# Altium PCB PC110.PcbDoc (part 12 of 24)
Units mm, origin at the board's own origin, x right, y up, seen from the top; angles counter-clockwise.
Board outline 150.05 x 107.35 mm, 10 copper layers (In2.Cu, F.Cu, B.Cu, In1.Cu, In3.Cu, In4.Cu, In5.Cu, In6.Cu, In7.Cu, In8.Cu); 936 components, 1434 nets, 4891 pads, 6088 vias.
Unrouted connection lines stored in the file: 2995.
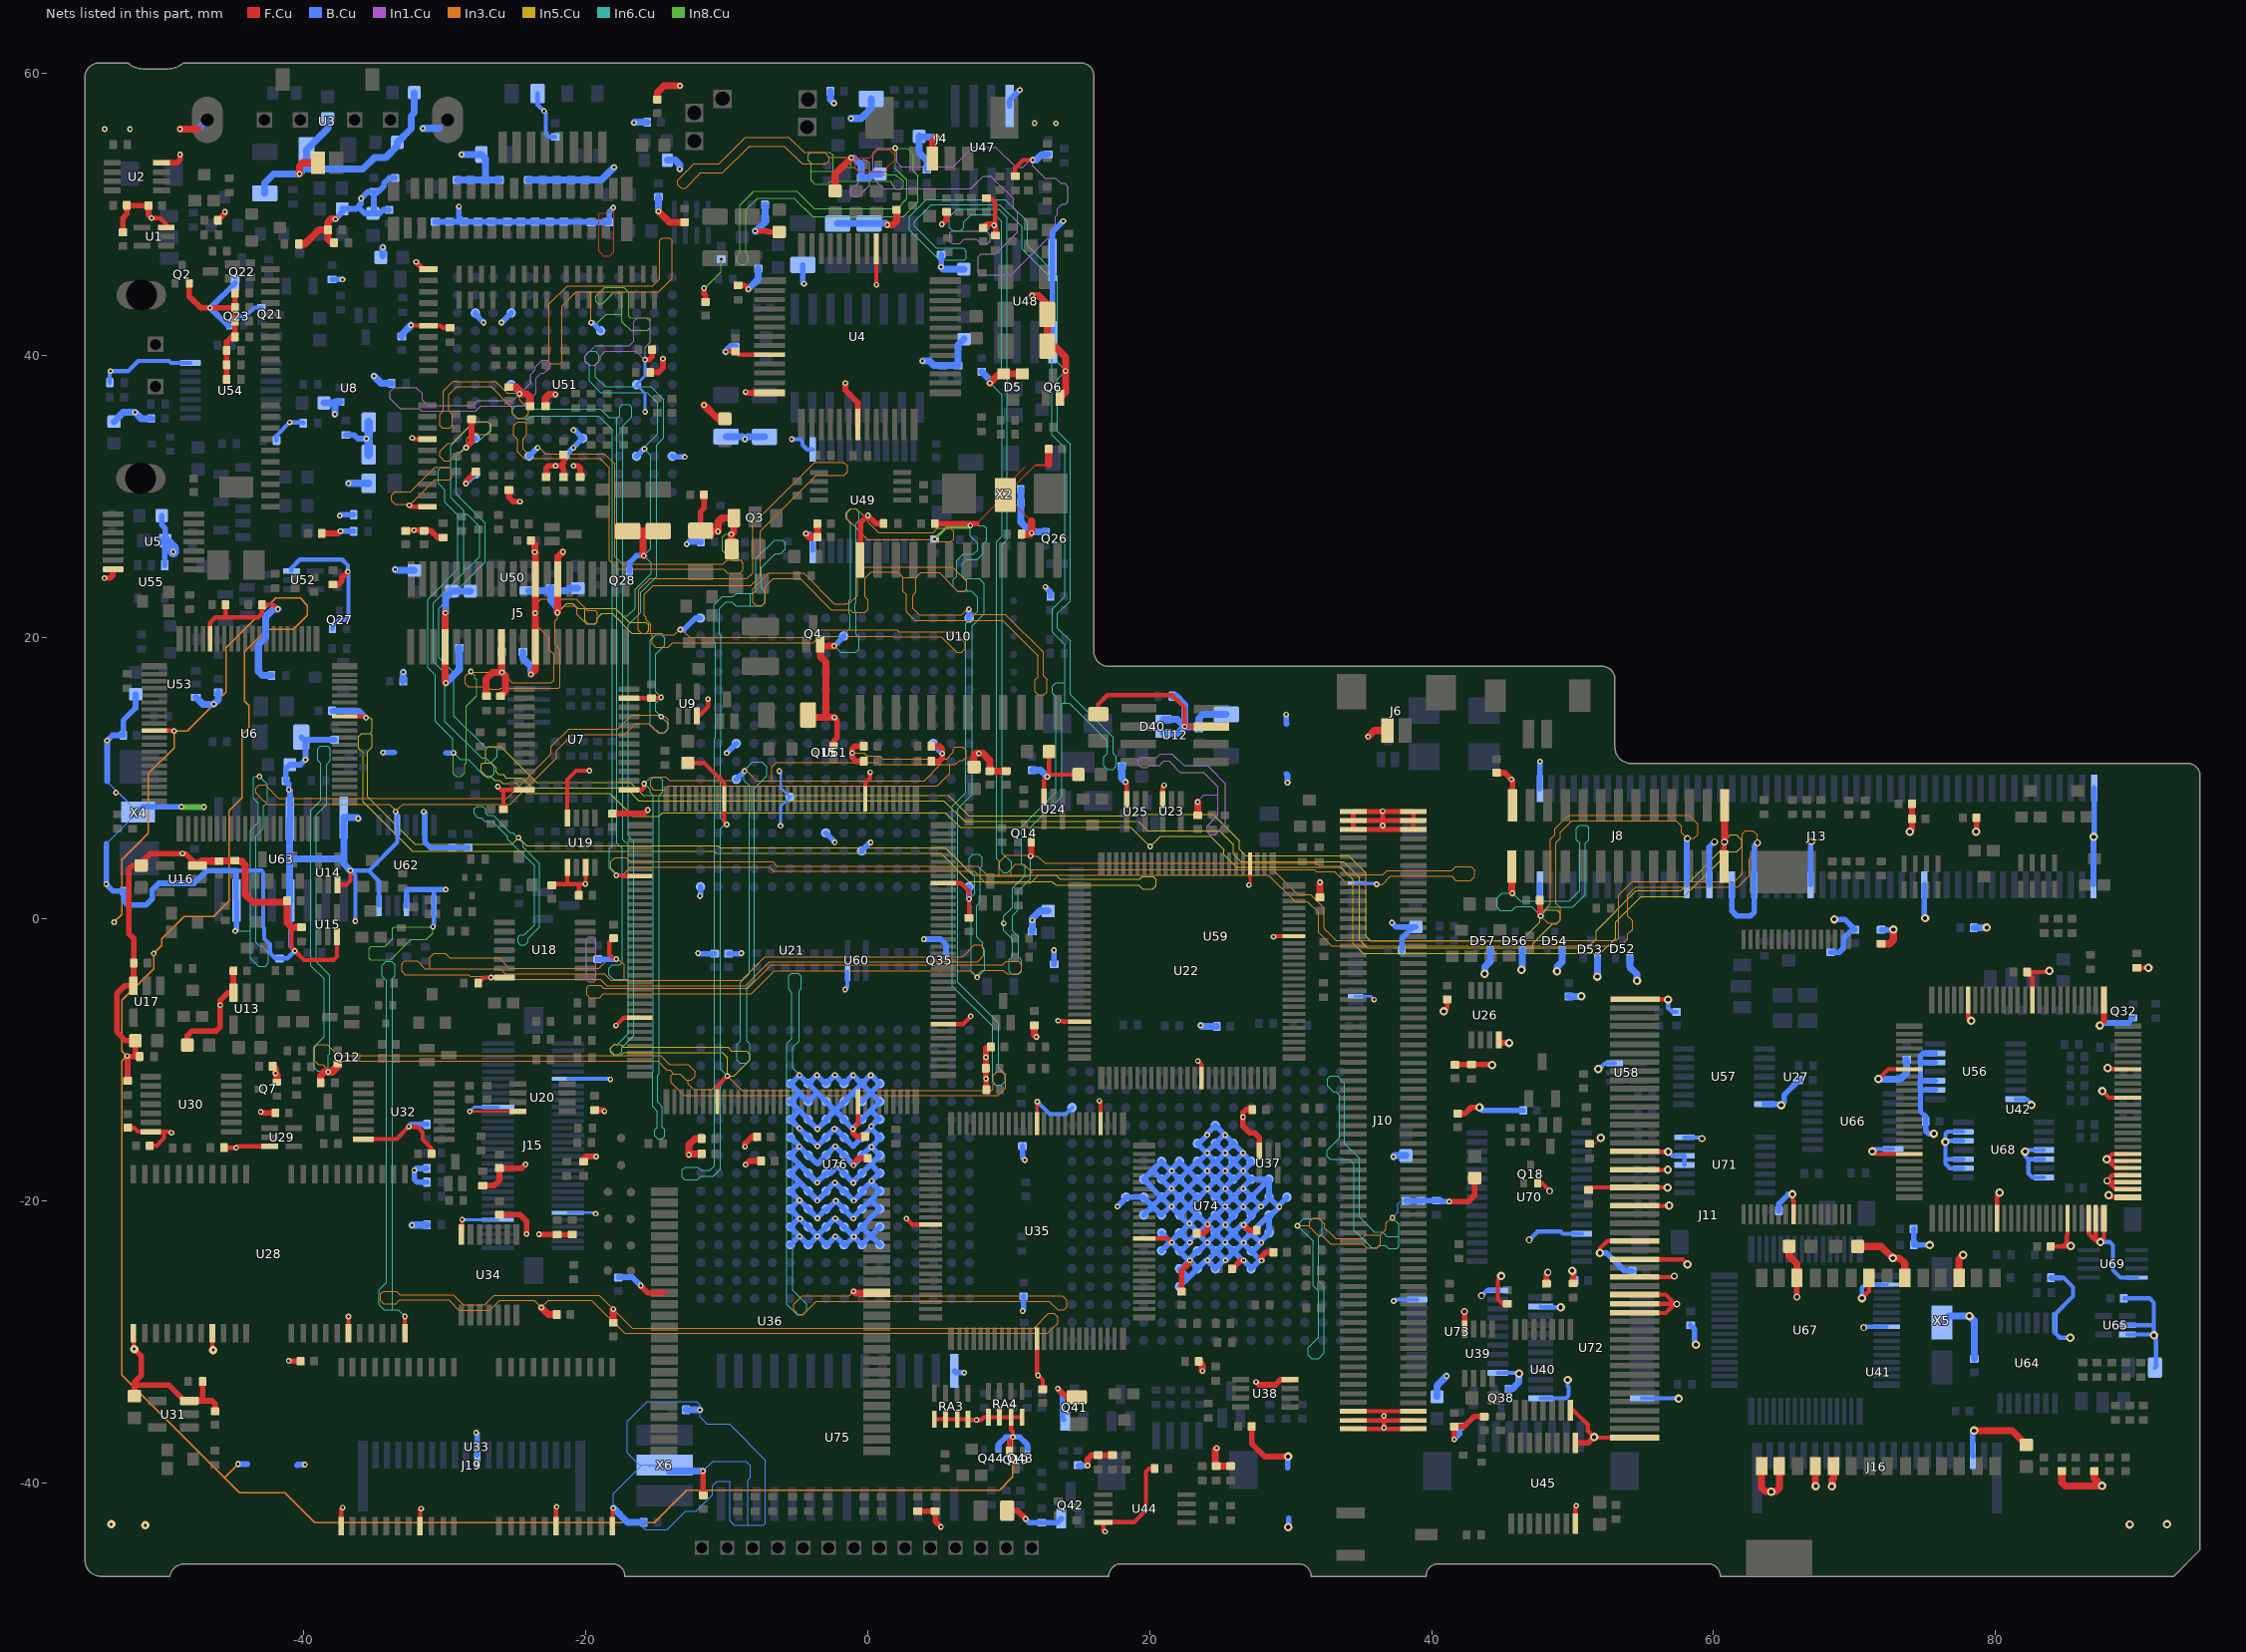
[diagram p19: the nets of this part, all layers, seen from the top]

## Via types
v1: diameter 0.3, hole 0.2, B.Cu to In8.Cu, tented both sides, 1934 vias
v2: diameter 0.4, hole 0.2, F.Cu to B.Cu, tented both sides, 1902 vias
v3: diameter 0.3, hole 0.2, F.Cu to In1.Cu, tented both sides, 1729 vias
v4: diameter 0.6, hole 0.3, F.Cu to B.Cu, tented both sides, 354 vias
v5: diameter 0.5, hole 0.3, F.Cu to B.Cu, tented both sides, 136 vias
v6: diameter 0.4, hole 0.2, B.Cu to In8.Cu, tented both sides, 12 vias
v7: diameter 0.3, hole 0.2, F.Cu to B.Cu, tented both sides, 6 vias
v8: diameter 0.6, hole 0.2, F.Cu to B.Cu, tented both sides, 4 vias
v9: diameter 0.5, hole 0.2, B.Cu to In8.Cu, tented both sides, 3 vias
v10: diameter 0.5, hole 0.2, F.Cu to B.Cu, tented both sides, 2 vias
v11: diameter 0.4, hole 0.3, F.Cu to B.Cu, tented both sides, 2 vias
v12: diameter 0.3, hole 0.2, F.Cu to In4.Cu, tented both sides, 2 vias
v13: diameter 0.6, hole 0.3, B.Cu to In8.Cu, tented both sides, 1 vias
v14: diameter 0.3, hole 0.2, F.Cu to In3.Cu, tented both sides, 1 vias

## Nets (pads, with @x,y where several pads share a name; then routed paths per layer and width w, separated by ;. In a path a pad name is that pad's centre, name@x,y a point inside that pad or via, vN(x,y) a via of type N, cw(c..) or ccw(c..) an arc to the next point about the centre after c; other vN are vias at no path point) (continued)
GND: C1.1 C2.2 C3.2 C4.2 C5.2 C6.1 C7.2 C8.2 C9.2 C14.2 C16.2 C17.2 C19.1 C20.1 C22.2 C24.1 C26.2 C27.2 C28.2 C30.1 C31.1 C32.2 C33.2 C34.2 C35.1 C36.1 C37.2 C38.2 C39.2 C40.2 C41.2 C42.1 C43.2 C44.1 C45.2 C47.2 C48.2 C49.1 C50.1 C51.2 C52.2 C53.1 C54.2 C55.1 C56.2 C57.1 C58.1 C59.2 C61.2 C62.1 C63.1 C64.1 C66.1 C68.2 C69.2 C70.1 C71.1 C72.2 C73.1 C74.1 C75.2 C76.2 C77.1 C78.1 C79.2 C80.2 C81.2 C82.2 C83.2 C84.2 C86.2 C87.2 C88.1 C90.1 C91.2 C92.1 C93.2 C94.2 C95.2 C96.1 C97.2 C98.2 C99.1 C100.2 C101.1 C102.1 C103.2 C104.1 C105.2 C106.1 C107.1 C108.1 C109.1 C110.1 C111.2 C112.1 C113.1 C114.1 C115.1 C116.2 C117.1 C118.2 C119.2 C120.2 C121.2 C122.2 C123.2 C124.1 C125.1 C126.2 C127.1 C128.2 C129.2 C131.2 C132.2 C133.2 C134.1 C135.2 C136.2 C139.1 C144.1 C145.1 C148.1 C149.1 C151.2 C152.2 C153.2 C155.1 C156.1 C158.1 C159.1 C160.1 C161.2 C162.2 C163.1 C164.1 C165.2 C166.2 C167.1 C168.1 C169.2 C170.2 C171.2 C172.1 C173.2 C174.2 C175.2 C176.2 C177.1 C178.2 C179.2 C180.2 C181.2 C182.2 C183.2 C184.2 C185.2 C186.2 C187.2 C188.2 C189.1 C190.2 C191.2 C192.2 C193.2 C194.2 C195.1 C196.2 C197.1 C198.2 C199.2 C200.1 C201.2 C202.1 C203.1 C204.1 C205.2 C206.1 C208.1 C210.1 C211.1 C212.2 C215.2 C216.2 C217.2 C218.2 C219.2 C220.1 C221.1 C222.1 C223.1 C224.1 C226.1 C227.1 C228.2 C229.1 C230.1 C231.1 C232.1 C233.2 C234.1 C235.2 C236.2 C237.2 C239.1 C241.1 C242.1 C243.2 C244.1 C245.1 C246.2 C247.2 C249.1 C250.1 C251.1 C252.2 C253.2 C254.1 C255.1 C256.1 C258.1 C259.1 C260.1 C261.2 C262.1 C263.1 C264.1 C265.1 C267.1 C268.1 C269.1 C271.2 C272.2 C273.2 C274.2 C275.2 C276.2 C277.1 C278.1 C279.2 C280.1 C281.1 C282.2 C283.2 D5.1 D5.3 D23.2 D36.2 D40.1 D40.2 D41.2 D47.2 D52.1 D53.1 D54.1 D56.1 D57.1 J4.2 J5.7 J5.9 J5.24 J5.29 J5.32 J6.2 J8.1 J8.13 J8.14 J8.26 J10.1 J10.2 J10.3 J10.68 J10.69 J10.70 J10.71 J10.72 J10.73 J10.138 J10.139 J10.140 J11.1 J11.15 J11.16 J11.17 J11.19 J11.21 J11.23 J11.27 J11.29 J11.31 J11.33 J11.50 J13.1 J13.50 J13.51 J13.64 J13.66 J13.68 J13.70 J13.75 J13.85 J13.100 J15.10 J15.26 J15.36 J15.55 J16.2 J19.9 L2.1 L10.2 Q2.2 Q3.1 Q4.1 Q6.1 Q7.2 Q12.2 Q14.2 Q15.2 Q18.2 Q19.2 Q21.2 Q22.1 Q23.2 Q26.2 Q27.2 Q28.2 Q32.2 Q35.2 Q38.2 Q41.1 Q42.1 Q43.2 Q44.2 R1.1 R2.1 R5.1 R6.1 R7.1 R10.1 R11.2 R13.1 R15.2 R18.2 R19.1 R22.1 R23.2 R29.2 R33.2 R49.2 R57.2 R60.1 R61.1 R63.1 R66.1 R73.1 R77.2 R80.1 R82.2 R83.2 R90.1 R91.2 R98.2 R108.2 R113.1 R126.2 R131.1 R145.1 R147.2 R150.2 R151.1 R153.1 R155.1 R160.1 R184.2 R186.2 R199.1 R202.1 R209.2 R210.2 R211.2 R213.2 R218.1 R219.1 R223.2 R224.2 R230.1 R231.1 R233.2 R247.2 R259.2 R263.2 R264.2 R265.2 R267.2 R269.2 R270.2 R271.1 R273.2 R275.2 R279.2 R280.2 R314.2 R327.2 R379.1 R383.1 R395.1 R402.2 R404.2 R405.2 R406.2 R408.1 R411.1 RA3.5 RA3.6 RA3.7 RA3.8 RA4.5 RA4.6 RA4.7 RA4.8 U1.3 U2.4 U3.2 U4.5 U4.22 U4.26 U4.33 U5.7 U6.16 U6.30 U6.73 U7.12 U7.13 U7.23 U8.21 U8.27 U8.35 U8.40 U9.3 U10.12 U12.7 U13.3 U14.3 U15.3 U16.3 U17.3 U18.7 U19.4 U19.5 U19.7 U20.4 U21.8 U21.28 U21.44 U21.64 U21.80 U21.100 U21.116 U21.136 U22.4 U22.45 U22.65 U22.93 U23.3 U24.3 U25.3 U26.4 U27.24 U28.23 U28.30 U28.39 U28.44 U29.3 U30.7 U31.3 U32.7 U33.23 U33.30 U33.39 U33.44 U34.7 U35.4 U35.13 U35.37 U35.63 U35.87 U36.15 U37.3 U38.4 U39.4 U40.7 U41.3 U41.6 U41.8 U41.12 U41.15 U41.16 U41.18 U41.19 U42.10 U42.20 U42.23 U42.24 U42.25 U42.26 U42.27 U42.28 U42.29 U42.30 U42.31 U42.32 U42.40 U42.44 U42.51 U42.61 U42.70 U42.82 U42.94 U44.4 U45.8 U45.9 U47.4 U48.4 U48.5 U49.12 U49.13 U50.3 U51.B3 U51.B10 U51.B12 U51.D3 U51.D7 U51.E11 U51.G11 U51.H10 U51.J4 U51.L7 U51.L11 U51.N11 U52.3 U53.3 U54.7 U55.3 U56.7 U56.9 U56.10 U56.12 U56.13 U57.7 U58.3 U59.23 U59.39 U60.3 U61.A1 U61.A16 U61.C8 U61.C10 U61.F11 U61.H13 U61.J2 U61.K14 U61.P8 U61.T1 U61.T16 U62.1 U62.4 U62.7 U62.10 U62.13 U63.5 U63.8 U63.12 U63.15 U64.7 U65.2 U65.3 U66.7 U67.18 U67.24 U68.4 U68.5 U68.7 U68.9 U68.10 U68.12 U68.13 U69.4 U70.12 U71.4 U71.5 U71.7 U72.12 U72.13 U72.23 U73.1 U73.10 U73.19 U74.D7 U74.E7 U74.E8 U74.E9 U74.E11 U74.F6 U74.F7 U74.F8 U74.F9 U74.F10 U74.F11 U74.G6 U74.G7 U74.G8 U74.G9 U74.G10 U74.G11 U74.G12 U74.H5 U74.H6 U74.H7 U74.H8 U74.H9 U74.H10 U74.H11 U74.H12 U74.J4 U74.J5 U74.J6 U74.J7 U74.J8 U74.J9 U74.J10 U74.J11 U74.J12 U74.J13 U74.K5 U74.K6 U74.K7 U74.K8 U74.K9 U74.K10 U74.K11 U74.K12 U74.L6 U74.L7 U74.L8 U74.L9 U74.L10 U74.L11 U74.M8 U74.M9 U74.M10 U74.N9 U74.P1 U75.14 U76.F4 U76.F5 U76.F6 U76.F7 U76.F8 U76.F9 U76.F10 U76.F11 U76.F12 U76.F13 U76.G4 U76.G5 U76.G6 U76.G7 U76.G8 U76.G9 U76.G10 U76.G11 U76.G12 U76.G13 U76.H4 U76.H5 U76.H6 U76.H7 U76.H8 U76.H9 U76.H10 U76.H11 U76.H12 U76.H13 U76.J4 U76.J5 U76.J6 U76.J7 U76.J8 U76.J9 U76.J10 U76.J11 U76.J12 U76.J13 U76.K4 U76.K5 U76.K6 U76.K7 U76.K8 U76.K9 U76.K10 U76.K11 U76.K12 U76.K13 U76.L4 U76.L5 U76.L6 U76.L7 U76.L8 U76.L9 U76.L10 U76.L11 U76.L12 U76.L13 X2.3 X4.3 X5.3 X6.3 | length 4862.6
  F.Cu w0.08: C2.2@-52.56,50.63 C2.2@-52.54,50.61 ; -47.51,56.04 -46.85,56.7 ; C38.2@-32.77,27.55 C38.2@-32.73,27.59 ; v2@-18.05,-27.67 v2(-18.04,-27.66) ; -9.68,27.07 -9.66,27.05 ; v2(-1.17,54) 0.15,54 0.73,54.58 1.54,54.58 1.92,54.2 1.92,53.87 1.38,53.33 1.38,53.1 1.28,53 -0.63,53 -0.91,53.28 -0.91,53.69 -0.6,54 ; v2(7.28,27.92) 7.6,27.92 X2.3@9.77,30.09 ; 7.74,28.06 X2.3@9.77,30.09 ; v2(8.96,49.22) v2@9.04,49.3 ; X2.3@9.77,30.68 11.16,32.07 ; 11.62,28.24 X2.3@9.77,30.09 ; 12.83,32.19 11.87,32.19 X2.3@9.77,30.09 ; 12.84,32.26 11.94,32.26 X2.3@9.77,30.09 ; v2(13.5,-7.19) v2@13.52,-7.21 ; v2(23.4,8.31) v2@23.41,8.3 ; v4@44.23,-10.3 v4(44.28,-10.35) ; R184.2@51.21,-15.93 51.58,-15.93 v4(52,-15.51) ; v4@56.73,-19.03 v4(56.74,-19.04) ; v4@56.74,-17.78 v4(56.75,-17.77) ; v4@56.84,-20.33 v4(56.85,-20.32) ; v5@57.38,-27.28 v5(57.39,-27.29) ; 57.8,-24.14 57.8,-24.13 ; v5@60.74,5.45 v5(60.77,5.48) v5@60.79,5.5 ; v5@65.9,-26.79 v5(65.91,-26.8) ; v4(68.39,-40.23) v4@68.4,-40.22 ; v4(78.62,6.21) v4@78.65,6.24 ; v4@85.26,-23.24 v4(85.33,-23.17) ; -19.08,47.38 -18.75,47.05 -18.31,47.05 -18.01,47.35 -18.01,50.44 v2(-18.04,50.47) -18.43,50.08 -19.01,50.08 -19.08,50.01 -19.08,47.38
  F.Cu w0.1: v2@-49.22,13.38 v2(-49.19,13.35)
  F.Cu w0.2: U34.7@-28.82,-22.36 U34.7@-28.77,-22.31 ; v2(-28.231,-13.628) -28.229,-13.63 U20.4@-24.82,-13.63 ; v2(27.04,2.43) 27.13,2.52 U22.4@27.13,3.94
  F.Cu w0.25: U35.13@12.01,-14.5 12.01,-13.46 12.02,-13.45 v2(12.02,-12.94)
  F.Cu w0.3: C99.1@-52.49,-14.78 -52.06,-14.78 -51.77,-15.07 U30.7@-50.86,-15.07 -49.92,-15.07 ; U28.23@-52.085,-29.37 -52.085,-30.435 v8(-52.04,-30.48) ; C95.2@-50.93,-16.07 -50.46,-16.07 -49.92,-15.53 -49.92,-15.07 ; v2(-50.8,49.73) -50.2,49.73 -49.76,49.29 U1.3@-49.76,49.06 ; U6.30@-50.6,13.38 v2@-49.22,13.38 ; v2(-49.39,-15.14) -49.46,-15.07 -49.92,-15.07 ; U6.16@-46.65,19.88 -46.65,21.04 -46.28,21.41 -45.54,21.41 ; U28.30@-46.485,-29.37 -46.485,-30.505 v8(-46.43,-30.56) ; C98.2@-45.66,-16.2 -45.65,-16.21 v2(-44.8,-16.21) -44.7,-16.11 U29.3@-42.41,-16.11 ; C27.2@-45.55,22.3 -45.55,21.61 -45.54,21.6 -45.54,21.41 ; v2(-41.84,22) -42.14,22.3 C28.2@-42.97,22.3 -42.97,21.67 -43.23,21.41 -45.54,21.41 ; -40.86,-0.58 -40.88,-0.6 -40.88,-2.01 v2(-40.64,-2.25) -39.99,-2.9 -39.44,-2.9 -39.43,-2.89 -37.89,-2.89 -37.65,-2.65 U15.3@-37.65,-1.23 ; U14.3@-37.61,2.45 -36.97,2.45 -36.7,2.72 v2(-36.7,3.45) ; U33.23@-37.355,-43.05 -37.355,-41.835 v2(-37.25,-41.73) ; U6.73@-37.1,14.38 -35.67,14.38 v2(-35.58,14.29) ; v2(-36.84,-28.18) -36.84,-29.365 U28.39@-36.835,-29.37 ; U32.7@-35.78,-15.6 -33.43,-15.6 v2(-32.55,-14.72) -31.97,-14.72 -31.57,-15.12 -31.57,-15.63 -30.94,-16.26 C105.2@-30.94,-16.63 ; U28.44@-32.835,-29.37 -32.835,-28.185 v2(-32.83,-28.18) ; v2(-32.52,29.36) -32.41,29.25 U8.21@-31.22,29.25 ; v2(-32.4,42.13) -32.37,42.1 U8.35@-31.17,42.1 -30.31,42.1 -30.16,41.95 R15.2@-29.64,41.95 ; v2(-32.31,34.13) -32.23,34.05 U8.27@-31.22,34.05 ; U33.30@-31.755,-43.05 -31.755,-41.885 v2(-31.67,-41.8) ; U34.7@-28.77,-22.31 v2(-28.77,-21.3) ; R98.2@-27.62,-4.54 -27.61,-4.54 -27.21,-4.14 v2(-26.72,-4.14) U18.7@-25.775,-4.14 ; v2(-26.24,9.4) -26.015,9.175 -25.84,9.175 ; R108.2@-25.84,7.79 -25.84,9.175 ; U7.12@-24.362,9.175 -25.84,9.175 ; C68.2@-22.41,2.41 -22.32,2.5 -21.29,2.5 ; U33.39@-22.105,-43.05 -22.105,-41.715 v2(-22.07,-41.68) ; U19.5@-21.31,3.69 -21.31,2.52 -21.29,2.5 ; U19.4@-21.31,7.19 -21.31,9.9 -20.68,10.53 v2(-19.74,10.53) ; C70.1@-20.49,1.69 -20.49,2.33 -20.5,2.34 -20.5,2.5 ; U19.7@-20.01,3.69 -20.01,2.52 v2(-20.03,2.5) -20.5,2.5 ; U33.44@-18.105,-43.05 -18.105,-41.835 v2(-18.04,-41.77) ; C64.1@-18.02,-1.35 -18.32,-1.65 -18.32,-2.5 -17.99,-2.83 v2(-17.83,-2.83) ; v2(-17.86,-7.54) -17.31,-6.99 U21.28@-16.18,-6.99 ; v2(-17.83,3.11) -17.44,3.11 -17.39,3.06 U21.8@-16.153,3.06 ; U7.13@-16.937,9.175 -16.025,9.175 -15.86,9.34 v2(-15.86,9.62) ; U7.23@-16.937,15.675 -16.933,15.68 -15.82,15.68 ; C35.1@-15.34,15.68 -15.82,15.68 ; v2(-14.65,15.73) -14.7,15.68 -15.82,15.68 ; C66.1@-12.76,11.075 -11.585,11.075 -10.18,9.67 -10.18,6.9 v2(-10,6.72) ; U9.3@-12.12,14.44 -11.94,14.44 -11.33,15.05 v2(-11.33,15.61) ; U21.44@-10.68,-12.94 -10.68,-11.84 v2(-9.96,-11.12) ; v2(-10.08,40.25) -10.05,40.28 C19.1@-9.39,40.28 -9.15,40.04 U4.22@-6.95,40.04 ; v2(-1.05,-14.89) -0.68,-14.52 U21.64@-0.68,-12.94 ; U21.116@-0.18,8.535 -0.18,9.653 0.17,10.003 v2(0.17,10.42) ; U4.5@0.6,47.54 0.6,45.02 v2(0.62,45) ; v2(2.74,-21.24) 3.15,-21.65 U35.37@4.46,-21.65 ; RA3.5@4.725,-35.47 RA3.6@5.525,-35.47 RA3.7@6.35,-35.47 RA3.8@7.125,-35.47 7.175,-35.52 v2(7.72,-35.52) 8.05,-35.52 8.25,-35.32 RA4.5@8.545,-35.32 RA4.6@9.345,-35.32 RA4.7@10.17,-35.32 ; U21.80@5.37,-7.44 6.75,-7.44 v2(7.3,-6.89) ; U21.100@5.37,2.56 6.62,2.56 7.19,1.99 v2(7.19,1.43) 7.18,1.42 C72.2@7.18,0.09 ; C8.2@8.41,51.14 8.74,51.14 9.04,50.84 v2@9.04,49.3 ; Q19.2@10.03,-37.7 10.03,-36.99 v2(10.29,-36.73) 10.29,-36.35 10.17,-36.23 RA4.7@10.17,-35.32 ; R33.2@10.46,52.71 10.46,53.29 11.02,53.85 v2(11.7,53.85) ; RA4.8@10.945,-35.32 RA4.7@10.17,-35.32 ; U35.63@12.01,-29.75 12.01,-32.28 v2(12.08,-32.35) 12.41,-32.68 C111.2@12.41,-33.35 ; U24.3@12.51,8.65 12.51,9.89 v2(12.73,10.11) 12.88,10.26 ; C80.2@12.855,11.89 12.855,10.285 12.88,10.26 ; v2@13.52,-7.21 13.81,-7.21 13.86,-7.26 U22.45@15.03,-7.26 ; D23.2@14.952,10.26 12.88,10.26 ; C54.2@16.34,14.55 16.34,15.24 16.99,15.89 21.58,15.89 22.48,14.99 v2(22.48,13.66) U12.7@24.39,13.66 ; v2(16.43,-12.88) 16.51,-12.96 U35.4@16.51,-14.5 ; v2(16.83,-43.44) 16.71,-43.32 U44.4@16.71,-42.77 18.88,-42.77 19.73,-41.92 19.73,-39.17 19.94,-38.96 C139.1@20.35,-38.96 ; v2(18.29,9.73) 18.37,9.65 U25.3@18.37,8.48 ; U35.87@19.61,-22.65 21.28,-22.65 v2(21.56,-22.93) ; U23.3@20.91,8.5 20.91,9.39 v2(21.02,9.5) ; v2(23.42,-10.06) 23.68,-10.32 U22.65@23.68,-11.26 ; v2(28.78,-1.25) 28.82,-1.21 U22.93@30.23,-1.21 ; J10.140@34.45,-36.15 J10.70@38.7,-36.15 ; J10.139@34.45,-35.55 36.65,-35.55 ; J10.138@34.45,-34.9 36.64,-34.9 ; v2(36.61,-36.06) 36.61,-35.53 36.62,-35.52 ; J10.69@38.7,-35.55 36.65,-35.55 ; J10.68@38.7,-34.9 36.64,-34.9 ; v4(40.85,-6.54) 41.11,-6.28 C90.1@41.11,-5.68 ; v4(44.94,-25.31) 44.69,-25.56 44.69,-26.95 45.02,-27.28 C127.1@45.37,-27.28 ; Q18.2@47.52,-18.73 47.83,-18.73 v5(48.38,-19.28) ; U40.7@49.85,-34.825 50.045,-34.825 51.075,-35.855 51.075,-36.285 v4(51.52,-36.73) 51.56,-36.77 54.38,-36.77 J11.1@54.39,-36.78 ; U45.8@50.195,-42.873 50.195,-41.665 v2(50.26,-41.6) ; C129.2@51.12,-19.21 51.3,-19.03 54.39,-19.03 v4@56.73,-19.03 ; v4(51.94,-23.68) 51.94,-23.34 52.45,-22.83 J11.23@54.39,-22.83 ; J11.15@54.39,-27.93 56.61,-27.93 57.02,-27.52 57.02,-27.28 ; J11.16@54.39,-27.28 57.02,-27.28 ; J11.17@54.39,-26.63 56.61,-26.63 57.02,-27.04 57.02,-27.28 ; J11.19@54.39,-25.38 57.15,-25.38 v5(57.21,-25.32) ; J11.21@54.39,-24.13 57.8,-24.13 ; J11.27@54.39,-20.33 v4@56.84,-20.33 ; J11.31@54.39,-17.78 v4@56.74,-17.78 ; J11.33@54.39,-16.48 54.4,-16.49 v4(56.78,-16.49) ; J11.50@54.44,-5.68 56.75,-5.68 v4(56.77,-5.7) ; v5@57.38,-27.28 57.02,-27.28 ; 57.8,-24.14 v4(58.14,-24.48) ; v4(65.59,-19.51) 65.59,-19.91 65.67,-19.99 U27.24@65.67,-20.93 ; v4(70.52,-26.88) 71.01,-26.39 U41.8@71.01,-25.44 ; v4(71.26,-16.47) 71.44,-16.65 U42.94@73.885,-16.65 ; v4(71.69,-11.34) 72.38,-10.65 U42.82@73.885,-10.65 ; U42.70@78.06,-5.725 78.06,-6.99 v4(78.28,-7.21) ; U42.10@80.11,-21.225 80.11,-19.57 v4(80.28,-19.4) ; U42.61@82.61,-5.725 82.61,-4.13 C94.2@82.23,-3.75 83.73,-3.75 v4(83.82,-3.66) ; C133.2@83.91,-23.21 84.75,-23.21 ; U42.20@85.11,-21.225 85.11,-22.37 85.06,-22.42 85.06,-22.9 ; U42.23@86.61,-21.225 86.61,-22.3 86.99,-22.68 ; U42.24@87.11,-21.225 87.11,-22.56 86.99,-22.68 ; v4(87.58,-12.19) 88.04,-12.65 U42.40@89.385,-12.65 ; U42.25@87.685,-21.225 87.685,-22.665 v4(87.44,-22.91) 87.22,-22.91 86.99,-22.68 ; v4(87.95,-10.55) 88.05,-10.65 U42.44@89.385,-10.65 ; v4(88.03,-19.57) 88.185,-19.725 U42.26@89.385,-19.725 ; U42.27@89.385,-19.15 88.51,-19.15 v5(87.91,-18.55) ; U42.28@89.385,-18.65 88.01,-18.65 v5(87.91,-18.55) ; U42.29@89.385,-18.15 88.31,-18.15 v5(87.91,-18.55) ; U42.30@89.385,-17.65 88.51,-17.65 v4(87.89,-17.03) ; U42.31@89.385,-17.15 88.01,-17.15 v4(87.89,-17.03) ; U42.32@89.385,-16.65 88.27,-16.65 v4(87.89,-17.03) ; R145.1@90.02,-3.45 v4(90.84,-3.45) ; -21.29,2.5 -20.5,2.5 ; 36.62,-35.52 v2(36.62,-35.23) 36.64,-35.21 36.64,-34.9 ; 36.62,-35.52 36.65,-35.55 ; 84.75,-23.21 85.29,-23.21 v4(85.33,-23.17) 85.06,-22.9 ; 84.75,-23.21 85.06,-22.9
  F.Cu w0.35: J10.72@34.45,7 36.54,7 ; v2(36.52,7.66) 36.54,7.64 36.54,7 ; J10.2@38.7,7 36.54,7 ; 36.54,7 36.53,6.99 v2(36.53,6.65) 36.56,6.62 36.56,6.35 ; 36.56,6.35 J10.73@34.45,6.35 J10.71@34.45,7.65 J10.1@38.7,7.65 J10.3@38.7,6.35 36.56,6.35
  F.Cu w0.4: v2(-54.15,24.19) -53.76,24.19 -53.532,24.418 U5.7@-53.533,24.82 ; C3.2@-52.83,48.71 -52.83,49.73 -52.56,50 C2.2@-52.56,50.63 ; C2.2@-52.54,50.61 C1.1@-51.02,50.61 -51.02,49.95 v2(-50.8,49.73) ; R82.2@-52.5,-11.46 -52.5,-9.74 v2(-52.54,-9.7) -52.51,-9.73 -51.95,-9.73 ; v8(-52.04,-30.48) -51.54,-30.98 -51.54,-32.37 -52.02,-32.85 C100.2@-52.02,-33.825 -52.02,-33.03 -49.61,-33.03 -48.48,-34.16 U31.3@-48.122,-34.16 ; R90.1@-51.65,-9.74 -51.66,-9.73 -51.95,-9.73 ; U2.4@-50.09,53.64 -49.01,53.64 -48.78,53.87 v2(-48.78,54.24) ; C63.1@-48.265,-8.93 -48.265,-8.265 -47.93,-7.93 -46.22,-7.93 -45.93,-7.64 v2(-45.93,-6.1) -45.93,-5.76 -45.383,-5.212 U13.3@-45,-5.212 -45,-3.67 C55.1@-44.99,-3.66 ; Q2.2@-48.13,45.09 -48.13,44.18 -47.31,43.36 v2(-46.65,43.36) -44.91,43.36 R10.1@-44.89,43.38 ; U16.3@-47.552,3.81 -48.402,4.66 v2(-48.61,4.66) -50.88,4.66 -51.53,4.01 C59.2@-51.53,3.805 -52.155,3.805 -52.4,3.56 -52.4,-1.05 -52.06,-1.39 C62.1@-52.06,-3.11 -52.08,-3.13 U17.3@-52.08,-4.713 -52.693,-4.713 -53.27,-5.29 -53.27,-7.98 -52.63,-8.62 C57.1@-51.945,-8.62 -51.945,-9.515 -51.95,-9.52 -51.95,-9.73 ; R147.2@-47.19,-32.79 -47.19,-34.16 U31.3@-48.122,-34.16 ; C97.2@-46.29,-34.9 -46.29,-34.39 -46.52,-34.16 U31.3@-48.122,-34.16 ; C4.2@-46.09,49.57 -45.6,50.06 v2(-45.6,50.17) ; R2.1@-45.47,38.3 R5.1@-45.47,39.33 R13.1@-45.47,40.33 -45.47,40.94 -45.1,41.31 R7.1@-44.89,41.31 R6.1@-44.89,42.42 R10.1@-44.89,43.38 ; R1.1@-44.89,44.41 R10.1@-44.89,43.38 ; v2(-43.05,-13.67) -42.99,-13.73 C96.1@-42.02,-13.73 ; v2(-41.07,-31.32) -41.04,-31.35 C101.1@-40.23,-31.35 ; C26.2@-38.73,27.36 -37.56,27.36 v2(-37.4,27.52) ; R60.1@-37.93,23.73 -37.56,23.73 -37.31,23.98 -37.31,24.22 v2(-36.88,24.65) ; C38.2@-32.73,27.59 v2(-32.19,27.59) -31.51,27.59 C41.2@-31.47,27.55 -30.99,27.55 -30.51,27.07 R63.1@-30.12,27.07 ; v2(-32.03,46.62) -32.03,46.6 -31.53,46.1 U8.40@-31.17,46.1 ; v2(-28.5,30.9) -28.5,31.04 C31.1@-27.8,31.74 ; v2(-28.49,33.45) -28.1,33.84 R61.1@-28.1,35.46 ; R151.1@-27.31,-18.89 -26.5,-18.89 -26.13,-18.52 C102.1@-26.13,-17.65 -24.53,-17.65 v2(-24.27,-17.39) ; C104.1@-26.12,-20.96 -24.66,-20.96 -24.2,-21.42 v2(-24.2,-22.33) ; R66.1@-25.45,30.44 -25.45,29.92 -25.15,29.62 v2(-24.68,29.62) ; v2(-23.32,-22.35) -23.3,-22.37 R155.1@-22.03,-22.37 R153.1@-20.95,-22.37 ; C37.2@-22.82,31.36 -22.82,31.99 -22.66,32.15 v2(-22.15,32.15) -21.76,32.15 ; C39.2@-21.58,31.36 -21.58,31.97 -21.76,32.15 ; C42.1@-21.58,32.96 -21.58,32.33 -21.76,32.15 ; v2(-20.87,32.16) -20.54,32.16 -20.4,32.02 C32.2@-20.4,31.36 ; R150.2@-20.14,-17.19 -20.14,-16.96 -20.01,-16.83 v2(-19.26,-16.83) ; R160.1@-19.38,-13.54 -18.75,-13.54 v2(-18.67,-13.62) ; C69.2@-18.11,7.49 -15.86,7.49 v2(-15.61,7.74) ; v2(-16.1,-25.99) -15.58,-26.51 -14.42,-26.51 ; v2(-15.79,39.69) -15.5,39.69 -15.3,39.89 C5.2@-15.3,40.39 ; R18.2@-15.43,38.78 -14.85,38.78 -14.53,39.1 v2(-14.53,39.76) ; C51.2@-11.85,27.555 -11.85,28.91 -11.62,29.14 C48.2@-11.62,30.11 ; v2(-11.69,-39.14) -11.67,-39.16 C136.2@-11.67,-40.86 ; v2(-11.61,44.76) -11.61,44.37 -11.5,44.26 C17.2@-11.5,43.78 ; R29.2@-9.2,44.96 -8.74,44.96 v2(-8.47,44.69) ; v2(-8.7,-16.13) -8.7,-15.9 -8.24,-15.44 C110.1@-7.85,-15.44 ; v2(-8.67,-17.42) -8.4,-17.15 C113.1@-7.57,-17.15 ; v2(-8.67,37.4) -8.61,37.34 U4.26@-6.95,37.34 ; v2(-7.98,48.81) -7.12,48.81 -7.053,48.743 L2.1@-6.28,48.743 ; C47.2@-4.235,14.48 C47.2@-4.065,14.31 ; Q15.2@-2.43,12.31 -2.43,12.61 -2.16,12.88 -2.16,14.1 v2(-2.37,14.31) ; v2(-1.59,38.02) -1.59,37.53 -0.7,36.64 U4.33@-0.7,35.09 ; v2(-1.05,-14.89) -1.05,-15.14 -0.78,-15.41 C112.1@-0.18,-15.41 ; v2(-1.01,-17.46) -1.01,-17.29 -0.68,-16.96 C107.1@-0.01,-16.96 ; U10.12@-0.5,25.42 -0.5,28.13 v2(0.01,28.64) 0.59,28.06 R73.1@1.13,28.06 ; C77.1@-0.27,11.2 -0.83,11.2 -1.1,11.47 v2(-1.1,11.79) -1.1,12.09 -0.92,12.27 C73.1@-0.27,12.27 ; R199.1@3.54,-41.99 R202.1@4.79,-41.99 4.79,-42.7 v2(5.19,-43.1) ; C81.2@4.51,11.2 5.07,11.2 5.29,11.42 v2(5.29,11.76) 5.29,12.09 5.11,12.27 C75.2@4.51,12.27 ; C52.2@4.76,28.06 7.74,28.06 ; v2(5.26,49.28) 5.59,49.61 C24.1@5.59,50.18 ; C16.2@8.19,49.03 8.19,49.04 8.46,49.31 8.87,49.31 v2(8.96,49.22) 9.07,49.11 R23.2@9.07,48.48 ; C78.1@8.41,-12.09 8.39,-12.07 v2(8.39,-11.32) 8.37,-11.3 C71.1@8.37,-10.57 8.38,-10.56 v2(8.38,-9.79) 8.38,-9.14 8.45,-9.07 ; C135.2@9.89,-41.95 10.62,-41.95 11.19,-42.52 v2(11.19,-42.54) ; v2(11.55,4.48) 11.6,4.53 Q14.2@11.6,5.45 ; v2(13.48,-33.29) 14.1,-33.91 C118.2@14.82,-33.91 ; v2(15.6,-38.75) 15.6,-38.29 15.88,-38.01 R211.2@16.35,-38.01 R210.2@17.37,-38.01 ; C122.2@22.26,-26.42 22.26,-24.92 22.84,-24.34 v2(22.84,-24.2) ; C117.1@23.33,-22.28 23.84,-22.28 24.1,-22.02 v2(24.1,-21.65) ; C114.1@25.84,-24.81 26.45,-24.2 v2(26.66,-24.2) ; v2(26.66,-21.67) 27.05,-22.06 C119.2@27.6,-22.06 ; C121.2@27.24,-35.97 27.24,-37.19 28.16,-38.11 v4(29.81,-38.11) ; C120.2@27.28,-13.51 26.83,-13.51 26.62,-13.72 v2(26.62,-14.04) 26.62,-14.69 27.08,-15.15 27.45,-15.15 27.78,-15.48 U37.3@27.78,-16.45 ; v2(27.55,-32.82) 27.75,-33.02 28.92,-33.02 29.29,-32.65 U38.4@29.94,-32.65 ; v2(27.93,-24.21) 27.93,-23.93 28.22,-23.64 28.77,-23.64 C116.2@28.78,-23.63 ; v2(41.25,-20.03) 42.59,-20.03 43.05,-19.57 C124.1@43.05,-18.365 ; v2(41.6,-36.89) C125.1@41.6,-35.98 42.3,-35.98 43,-35.28 C123.2@43.73,-35.28 ; C87.2@41.66,-10.33 41.69,-10.3 R126.2@42.83,-10.3 v4@44.23,-10.3 ; C126.2@41.84,-13.78 42.37,-13.78 42.8,-13.35 v4(43.39,-13.35) ; v5(42.32,-27.82) 42.34,-27.84 U39.4@42.34,-29.05 ; C88.1@44.61,10.39 45.19,10.39 v2(45.66,9.92) 45.74,9.84 J8.13@45.74,8.08 ; U26.4@44.77,-8.55 44.99,-8.77 v4(45.5,-8.77) ; C86.2@47.67,1.34 47.67,0.29 v2(47.73,0.23) ; C128.2@48.15,-25.86 48.15,-25.14 v5(48.24,-25.05) ; v4(49.97,-24.93) 50.04,-25 R186.2@50.04,-25.82 ; U45.9@50.195,-37.148 51.102,-37.148 v4(51.52,-36.73) ; J8.26@60.74,3.73 v5@60.74,5.45 ; v5@65.9,-26.79 65.9,-25.45 U41.12@65.91,-25.44 ; v4(73.91,6.2) 74.07,6.36 C92.1@74.07,7.12 C91.2@74.07,8.19 ; v4@78.65,6.24 C93.2@78.65,7.19 ; v4(87.4,-7.54) 87.685,-7.255 U42.51@87.685,-5.725
  F.Cu w0.5: v2(-48.78,56.04) -47.51,56.04 ; U16.3@-47.552,3.81 -47.242,4.12 C56.2@-46.02,4.12 -45.99,4.15 R91.2@-44.89,4.15 -44.46,4.15 -44.17,3.86 -44.17,1.78 -43.59,1.2 -41.3,1.2 C58.1@-41.19,1.31 -41.19,-0.25 -40.86,-0.58 -40.18,-0.58 R83.2@-40.17,-0.57 ; C61.2@-42.21,-10.43 -42.01,-10.63 v2(-42.01,-10.93) -41.91,-11.03 -41.91,-11.54 Q7.2@-41.9,-11.55 ; R11.2@-40.35,47.89 -39.93,47.89 -38.93,48.89 R19.1@-38.29,48.89 ; v2(-40.31,52.86) -40.31,53.42 -40.08,53.65 U3.2@-39,53.65 ; R80.1@-38.81,-11.59 -38.81,-11.1 -38.55,-10.84 v2(-38.27,-10.84) -37.98,-10.84 -37.59,-10.45 Q12.2@-37.59,-10.26 ; R22.1@-37.86,47.98 -38.04,47.98 -38.29,48.23 R19.1@-38.29,48.89 ; v2(-37.76,49.66) -38.07,49.66 -38.29,49.44 R19.1@-38.29,48.89 ; v2(-29.95,21.73) -29.98,21.7 J5.24@-29.98,19.33 -29.98,16.81 v2(-29.93,16.76) ; R49.2@-27.04,15.82 -27.09,15.87 -27.09,17.04 -26.62,17.51 v2(-25.95,17.51) ; R57.2@-26.04,15.82 -25.71,16.15 -25.71,17.27 v2(-25.95,17.51) ; J5.29@-25.98,19.33 -25.98,17.54 v2(-25.95,17.51) ; C43.2@-25.46,37.74 -24.91,37.74 -24.7,37.53 v2(-24.7,37.26) -24.18,37.26 -23.95,37.03 C34.2@-23.95,36.39 ; v2(-23.89,17.37) -23.58,17.68 J5.32@-23.58,19.33 -23.58,21.7 v2(-23.59,21.71) -23.58,21.72 J5.9@-23.58,24.13 -23.58,26.01 v2(-23.61,26.04) -23.61,26.58 C33.2@-23.89,26.86 ; v2(-23.16,-27.54) -22.66,-28.04 C106.1@-22.05,-28.04 ; C40.2@-22.86,36.39 -22.86,36.99 -22.63,37.22 v2(-22.15,37.22) ; v2(-22.01,21.74) -21.98,21.77 J5.7@-21.98,24.13 -21.98,25.7 v2(-21.62,26.06) ; C103.2@-18.05,-28.62 v2@-18.05,-27.67 ; C30.1@-17.03,27.525 -15.95,27.525 ; v2(-15.89,25.78) -15.95,25.84 -15.95,27.525 ; C7.2@-14.93,58.13 -14.93,58.63 -14.45,59.11 v2(-13.33,59.11) ; C36.1@-14.86,27.525 -15.95,27.525 ; v2(-14.85,50.21) -14.08,49.44 C6.1@-12.99,49.44 ; C51.2@-11.85,27.555 -11.805,27.51 v2(-10.62,27.51) -10.62,28.17 -10.34,28.45 Q3.1@-9.493,28.45 -9.493,27.487 v2(-9.68,27.3) -9.68,27.07 ; C108.1@-11.78,-16.64 -12.61,-16.64 v2(-12.68,-16.71) -12.68,-16 -12.24,-15.56 C109.1@-11.78,-15.56 ; v2(-11.61,36.47) -10.635,35.495 C45.2@-10.14,35.495 ; C49.1@-9.66,26.24 -9.66,27.05 ; v2(-4.38,27.35) -4.13,27.1 C50.1@-3.58,27.1 C44.1@-3.58,28.06 ; C47.2@-4.065,14.31 -2.97,14.31 ; v2(-2.38,19.38) -3.27,19.38 Q4.1@-3.37,19.48 -3.37,18.64 -2.97,18.24 -2.97,14.31 ; v2(-2.37,14.31) -2.97,14.31 ; C22.2@-2.31,51.655 -2.31,52.86 v2(-1.17,54) ; v2(-1,-26.4) -0.89,-26.51 U36.15@0.63,-26.51 ; v2(1.39,49.25) 1.77,49.25 2.04,49.52 C20.1@2.04,50.32 ; J4.2@4.59,53.95 4.59,55.17 v2(4.88,55.46) ; C79.2@7.54,10.785 7.54,11.64 7.66,11.76 v2(7.88,11.76) 8.16,11.76 8.66,11.26 C76.2@8.66,10.51 C82.2@9.83,10.51 ; v2(8.67,38.02) 9.325,38.675 D5.1@9.635,38.675 D5.3@10.96,38.675 ; R77.2@10.9,27.31 10.91,27.3 11.53,27.3 v2(11.62,27.39) 11.62,28.24 ; v2(11.65,44.24) 12.12,44.24 12.725,43.635 C14.2@12.725,42.9 C9.2@12.725,40.65 13.24,40.65 14.03,39.86 v2(14.03,38.88) 14.03,37.37 Q6.1@13.64,36.98 ; R113.1@11.82,-7.53 11.82,-8.2 v2(11.96,-8.34) ; 12.84,32.26 C53.1@12.84,33.35 ; C83.2@23.41,7.37 v2@23.41,8.3 ; C115.1@23.47,-31.36 23.74,-31.63 v2(23.74,-32.04) ; v2(24.75,-37.52) 24.66,-37.61 24.66,-38.73 R209.2@24.72,-38.79 R213.2@25.74,-38.79 ; C84.2@32.08,1.55 v2(32.08,2.61) ; v2(35.49,12.95) 35.92,13.38 J6.2@36.86,13.38 ; J8.14@45.69,3.73 45.69,1.88 v2(45.73,1.84) ; v5@60.79,5.5 J8.1@60.79,8.08 ; U41.15@63.41,-38.79 63.41,-40.34 63.67,-40.6 v4(64.09,-40.6) 64.41,-40.6 64.66,-40.35 U41.16@64.66,-38.79 ; C134.1@65.355,-23.2 65.355,-23.885 65.91,-24.44 U41.12@65.91,-25.44 ; U41.18@67.21,-38.79 67.21,-40.17 v4(67.25,-40.21) ; v4@68.4,-40.22 68.4,-39.75 68.51,-39.64 U41.19@68.51,-38.79 ; C132.2@70.22,-23.21 71.89,-23.21 v4(72.72,-24.04) 73.2,-24.04 73.56,-24.4 U41.6@73.56,-25.44 ; R131.1@71.87,-1.75 72.47,-1.75 72.75,-1.47 v4(72.75,-0.74) ; U41.3@77.41,-25.44 77.41,-24.1 v4(77.7,-23.81) ; v4(78.47,-36.27) 81.188,-36.27 C131.2@82.18,-37.263 ; C145.1@84.7,-39.145 84.7,-39.96 84.94,-40.2 v4(87.55,-40.2) 87,-39.65 C144.1@87,-39.145
  In1.Cu w0.08: -26.53,36.78 -25.18,36.78 v2(-24.7,37.26) -23.93,38.03 -23.93,38.62 -23.58,38.97 -23.58,39.17 -23.11,39.64 -22.73,39.64 -22.54,39.45 -22.54,39.15 -22.96,38.73 -23.18,38.73 -23.54,38.37 -23.54,37.33 -24.47,36.4 -27.46,36.4 -27.8,36.06 -31.67,36.06 -31.84,36.23 -33.18,36.23 -33.88,36.93 -33.88,37.43 -33.6,37.71 -32.04,37.71 -31.6,37.27 -31.6,36.82 -31.22,36.44 -28.01,36.44 -27.67,36.78 -26.49,36.78 ; v2(-17.83,-2.83) -19.3,-2.83 ; v2(-1.17,54) -0.26,54 -0.26,53.87 ; v2(8.96,49.22) 8.8,49.22 8.44,48.86 8.39,48.81 ; v2(23.4,8.31) 23.4,8.39 23.77,8.76 23.82,8.81 24.85,8.81 ; -19.3,-2.83 -19.3,-2.89 -19.3,-4.31 -19.44,-4.45 -19.79,-4.45 -19.94,-4.3 -19.94,-1.39 -19.82,-1.27 -19.44,-1.27 -19.3,-1.41 -19.3,-2.83 ; -0.26,53.87 -0.11,53.87 0.11,53.65 0.11,52.055 -0.685,51.26 -1.01,51.26 -1.215,51.465 -1.215,51.79 -0.985,52.02 -0.85,52.02 -0.5,52.37 -0.5,52.98 -0.645,53.125 -0.645,53.635 -0.41,53.87 -0.26,53.87 ; 8.39,48.81 8.67,48.53 8.67,48.07 8.48,47.88 8.03,47.88 7.68,48.23 6.86,48.23 6.54,47.91 5.98,47.91 5.83,48.06 5.83,48.67 5.97,48.81 8.39,48.81 ; 24.85,8.81 24.85,9.37 23.81,10.41 22.17,10.41 21.37,11.21 21,11.21 20.71,10.92 19.99,10.92 19.835,10.765 19.405,10.765 19.185,10.985 19.185,11.295 19.405,11.515 19.785,11.515 19.84,11.46 20.49,11.46 20.75,11.72 21.6,11.72 22.43,10.89 24.09,10.89 25.38,9.6 25.38,6.91 25.38,6.76 24.625,6.005 24.235,6.005 24.05,6.19 24.05,6.61 24.85,7.41 24.85,8.81 ; -20.05,39.55 -20.05,39.95 -19.32,40.68 -16.9,40.68 -16.6,40.98 -16.6,42.4 -16.33,42.67 -15.7,42.67 -15.44,42.41 -15.44,40.91 -15.79,40.56 v2(-15.79,39.69) -15.83,39.69 -16.42,40.28 -17.44,40.28 -18.62,40.28 -18.97,39.93 -18.97,39.67 -19.35,39.29 -19.79,39.29 -20.05,39.55 ; 0.37,52.56 0.37,54.36 0.7,54.69 v2(1.95,54.69) 2.07,54.57 2.07,53.7 2.4,53.37 6.08,53.37 7.45,54.74 9.09,54.74 10.51,53.32 11,53.32 11.53,53.85 v2(11.7,53.85) 11.7,53.44 12.58,52.56 13.33,52.56 13.69,52.2 13.97,52.2 14.21,51.96 14.21,50.89 14.04,50.72 13.76,50.72 13.45,50.41 13.45,49.96 13.31,49.82 13.31,48.84 10.16,45.69 7.95,45.69 7.83,45.81 7.83,46.98 8.02,47.17 9.07,47.17 10.64,48.74 10.64,50.11 10.33,50.42 10.33,51.09 8.73,52.69 8.18,52.69 7.3,51.81 1.12,51.81 0.37,52.56
  In3.Cu w0.08: -31.07,-3.52 -31.07,-2.72 -30.77,-2.42 -29.97,-2.42 -29.64,-2.75 -26.15,-2.75 -25.42,-3.48 -19.07,-3.48 -18.34,-2.75 -17.95,-2.75 -17.87,-2.83 ; -26.53,-4.09 -26.67,-4.09 ; v2(-23.41,33.44) -23.78,33.07 -24.17,33.07 -24.46,33.36 -24.46,34.05 -24.18,34.33 -24.18,35.12 -24.33,35.27 -24.85,35.27 -25.11,35.01 -25.11,34.31 -24.83,34.03 -24.83,33.14 -24.36,32.67 -18.99,32.67 -18.34,32.02 -18.34,25.43 -17.75,24.84 -10.23,24.84 -9.945,24.555 -9.045,24.555 -8.84,24.76 -8.84,25.27 -9.04,25.47 -9.99,25.47 -10.26,25.2 -17.42,25.2 -17.95,25.73 -17.95,32.28 -18.69,33.02 -22.86,33.02 -23.28,33.44 ; v2(-19.62,42.31) -19.62,44.49 ; -17.93,-2.77 -17.87,-2.83 ; -1.3,54.05 -1.22,54.05 ; v2(-1.17,54) -1.22,54.05 ; v2(-1.1,11.79) -0.26,11.79 -0.04,11.57 0.88,11.57 1.07,11.38 5.59,11.38 6.07,11.86 6.07,12.07 6.21,12.21 6.74,12.21 6.97,11.98 6.97,11.48 6.75,11.26 6.52,11.26 6.22,10.96 5.81,10.96 ; 9.32,3.06 9.32,4.05 9.8,4.53 11.5,4.53 ; 11.44,4.53 11.5,4.53 ; 11.64,3.5 11.64,3.3 11.6,3.26 11.4,3.06 10.16,3.06 ; v2(30.48,-21.74) 31.34,-21.74 31.35,-21.73 ; v2(37.22,-21.18) 37.14,-21.18 36.76,-21.56 36.76,-22.02 36.63,-22.15 36.37,-22.41 ; -26.67,-4.09 -26.1,-4.09 -25.93,-4.26 -18.95,-4.26 -18.5,-4.71 -8.68,-4.71 -6.99,-3.02 7.8,-3.02 8.24,-2.58 8.24,-2.05 8.02,-1.83 7.56,-1.83 6.73,-2.66 -7.31,-2.66 -8.975,-4.325 -17.225,-4.325 -17.28,-4.27 ; -26.67,-4.09 v2(-26.72,-4.14) -26.81,-4.05 -28.19,-4.05 -28.31,-3.93 -32.8,-3.93 -33.04,-3.69 -33.04,-3.15 -32.86,-2.97 -31.95,-2.97 -31.4,-3.52 -26.05,-3.52 -25.71,-3.86 -18.69,-3.86 -18.23,-4.32 -17.33,-4.32 -17.28,-4.27 ; -19.62,44.49 -14.84,44.49 -13.88,45.45 -13.88,48.14 -14.06,48.32 -14.59,48.32 -14.76,48.15 -14.76,45.4 -15.24,44.92 -21.3,44.92 -22.59,43.63 -22.59,39.5 -22.49,39.4 -21.84,39.4 -21.69,39.55 -21.69,43.48 -20.68,44.49 -19.62,44.49 ; -17.87,-2.83 v2(-17.83,-2.83) -17.7,-2.83 -17.28,-3.25 -17.28,-4.27 ; -15.4,20.285 -15.985,20.285 -15.99,20.29 -16.08,20.29 -16.29,20.5 -16.29,21.52 -16.23,21.58 -16.23,23.37 -15.44,24.16 -8.56,24.16 -8.16,24.56 -8.16,28.01 -3.76,32.41 -1.7,32.41 -1.44,32.15 -1.44,31.74 -1.68,31.5 -3.65,31.5 -7.63,27.52 -7.63,24.34 -8.29,23.68 -15.2,23.68 -15.86,23.02 -15.86,21.54 -15.7,21.38 -15.7,21.216 -15.4,20.916 -15.4,20.285 ; -15.4,20.285 -15.28,20.285 ; -15.28,20.285 -14.625,20.285 -14.62,20.29 -14.495,20.165 -14.06,20.165 -13.735,20.165 -13.66,20.24 -13.36,20.54 v2(-13.29,20.54) -13.18,20.54 -12.63,19.99 -4.14,19.99 -3.62,20.51 2.1,20.51 2.22,20.39 6.14,20.39 6.93,19.6 6.93,19.18 6.665,18.915 6.325,18.915 5.22,20.02 1.83,20.02 1.77,20.08 -3.42,20.08 -3.88,19.62 -13.85,19.62 -14.17,19.3 -15.04,19.3 -15.28,19.54 -15.28,20.285 ; -13.79,-10.93 -13.95,-11.09 -13.95,-11.57 -13.02,-12.5 9.26,-12.5 9.79,-11.97 9.79,-11.03 9.56,-10.8 9.18,-10.8 8.9,-11.08 8.9,-12.04 8.78,-12.16 -8.92,-12.16 v2(-9.96,-11.12) -10.07,-11.12 -10.74,-11.79 -11.04,-12.09 -11.35,-12.09 -12.32,-12.09 -12.49,-11.92 -12.74,-11.67 -12.74,-11.41 ; -13.79,-10.93 -13.73,-10.99 -13.31,-10.99 -12.89,-11.41 -12.74,-11.41 ; -13.79,-10.93 -14.02,-10.7 -14.25,-10.7 -14.88,-10.07 -37.56,-10.07 -38.27,-10.78 v2(-38.27,-10.84) -38.27,-10.69 -38.67,-10.29 -38.98,-10.29 -39.21,-10.06 -39.21,-9.07 -39.02,-8.88 -38.33,-8.88 -37.55,-9.66 -14.7,-9.66 -14.035,-10.325 -12.745,-10.325 -12.25,-10.82 -12.25,-11.14 -12.52,-11.41 -12.74,-11.41 ; -6.79,9.82 -6.79,10.8 -6.47,11.12 0.69,11.12 0.85,10.96 5.16,10.96 ; -6.79,9.82 -7.89,9.82 -8.58,10.51 v2(-8.74,10.51) -8.79,10.51 -9.46,9.84 -14.09,9.84 -14.33,10.08 -15.18,10.08 -15.4,9.86 -15.4,9.41 -15.18,9.19 -14.38,9.19 -14.11,9.46 4.94,9.46 5.81,10.33 5.81,10.96 ; -6.79,9.82 4.02,9.82 5.16,10.96 ; -2.72,54.05 -1.22,54.05 ; -2.72,54.05 -2.72,53.78 -2.92,53.58 -4.66,53.58 -5.91,54.83 -8.39,54.83 -10.29,52.93 -11.86,52.93 -12.935,51.855 -13.245,51.855 -13.47,52.08 -13.47,52.43 -12.315,53.585 -10.565,53.585 -8.69,55.46 -5.59,55.46 -4.51,54.38 -3.05,54.38 -2.72,54.05 ; 2.51,24.23 2.51,23.26 2.75,23.02 2.75,21.78 3.35,21.18 9.58,21.18 12.08,18.68 12.08,17.18 11.87,16.97 11.87,16.13 12.065,15.935 12.515,15.935 12.7,16.12 12.7,17.02 12.45,17.27 12.45,18.92 9.75,21.62 7.53,21.62 v2(7.17,21.98) 7.04,21.98 6.66,21.6 3.65,21.6 3.19,22.06 3.19,22.97 3.42,23.2 3.42,24.24 ; 2.51,24.23 2.13,24.61 0.22,24.61 -0.2,24.19 -0.2,22.85 0.01,22.64 0.01,21.96 -0.205,21.745 -1.015,21.745 -1.02,21.75 -1.07,21.75 -1.26,21.94 -2.58,21.94 -4.8,24.16 -6.71,24.16 -7.27,23.6 -7.27,22.46 -7.48,22.25 -7.93,22.25 -8.15,22.47 -8.15,23.43 -7.03,24.55 -4.55,24.55 -2.375,22.375 -1.495,22.375 -1.49,22.38 -1.31,22.38 -0.72,22.97 -0.72,24.58 -0.32,24.98 6.01,24.98 7.03,23.96 7.03,23.46 6.83,23.26 6.4,23.26 5.06,24.6 3.78,24.6 3.42,24.24 ; 2.51,24.23 3.41,24.23 3.42,24.24 ; 5.16,10.96 5.81,10.96 ; 10.16,3.06 8.53,3.06 7.815,3.775 -6.435,3.775 -6.74,4.08 -16.85,4.08 -17.14,4.37 -17.94,4.37 -18.22,4.09 -18.22,3.61 -17.83,3.22 v2(-17.83,3.11) -17.41,3.11 -16.84,3.68 -6.99,3.68 -6.71,3.4 7.54,3.4 8.37,2.57 11.55,2.57 12.11,3.13 28.43,3.13 30.31,1.25 31.18,1.25 31.97,0.46 31.97,-0.94 32.92,-1.89 53.43,-1.89 53.92,-1.4 53.92,-1.04 54.25,-0.71 54.25,-0.11 53.9,0.24 53.9,1.71 54.47,2.28 61.72,2.28 62.52,3.08 62.52,4.28 63.11,4.87 v5(63.11,5.42) 63.08,5.45 63.08,5.98 62.78,6.28 62.24,6.28 62.03,6.07 62.03,3.24 61.47,2.68 54.24,2.68 53.27,1.71 53.27,-1.33 53.08,-1.52 33.21,-1.52 32.36,-0.67 32.36,0.79 31.41,1.74 30.51,1.74 28.92,3.33 28.92,3.53 ; 10.16,3.06 10.16,3.56 10.5,3.9 11.06,3.9 11.43,3.53 28.92,3.53 ; 11.5,4.53 v2(11.55,4.48) 12.05,4.48 12.56,3.97 31.85,3.97 32.05,3.77 33.49,3.77 34.11,3.15 36.53,3.15 36.83,3.45 41.42,3.45 41.7,3.73 42.79,3.73 43.04,3.48 43.04,3.03 42.76,2.75 41.71,2.75 41.42,3.04 37.09,3.04 36.52,2.47 v2(36.1,2.47) 34.03,2.47 33.12,3.38 31.82,3.38 31.67,3.53 28.92,3.53 ; 31.35,-21.73 31.35,-21.83 31.92,-22.4 32.21,-22.4 32.84,-23.03 35.12,-23.03 35.4,-23.31 36.11,-23.31 36.37,-23.05 36.37,-22.41 ; 31.35,-21.73 31.35,-21.6 31.35,-21.43 31.48,-21.3 31.6,-21.18 31.84,-21.18 31.97,-21.18 32.05,-21.26 32.42,-21.63 32.42,-21.89 32.9,-22.37 33.18,-22.65 35,-22.65 35.05,-22.65 35.1,-22.6 35.09,-22.61 35.29,-22.41 35.9,-22.41 36.37,-22.41 ; -43.41,8.95 -42.85,8.39 -42.82,8.39 -42.59,8.16 -33.92,8.16 -33.5,7.74 v2(-33.5,7.63) -33.28,7.85 -32.98,8.15 -25.36,8.15 -22.08,11.43 -22.08,11.97 -20.95,13.1 -17.23,13.1 -16.44,13.89 -15.58,13.89 -15.1,13.41 -14.98,13.41 -14.815,13.245 -14.385,13.245 -14.16,13.47 -14.16,14.16 -14.37,14.37 v2(-14.65,14.37) -14.77,14.49 -16.72,14.49 -17.72,13.49 -21.2,13.49 -22.45,12.24 -22.45,11.71 -25.58,8.58 -41.79,8.58 -42.72,9.51 -43.2,9.51 -43.41,9.3 -43.41,8.95 ; -34.54,-27.07 -34.34,-27.27 -34.26,-27.27 -34.255,-27.275 -33.465,-27.275 -33.2,-27.01 -29.71,-27.01 -28.99,-27.73 -26.81,-27.73 -26.1,-27.02 -23.68,-27.02 v2(-23.16,-27.54) -22.64,-27.02 -19.61,-27.02 -17.25,-29.38 12.74,-29.38 13.11,-29.01 13.475,-28.645 13.475,-28.225 13.21,-27.96 12.83,-27.96 11.78,-29.01 -16.69,-29.01 v2(-18.04,-27.66) -19.04,-26.66 -26.5,-26.66 -27.18,-27.34 -28.7,-27.34 -29.41,-26.63 -33.19,-26.63 -33.44,-26.38 -34.36,-26.38 -34.54,-26.56 -34.54,-27.07 ; -33.78,29.68 -33.545,29.445 -32.695,29.445 -32.69,29.45 -32.61,29.45 v2(-32.52,29.36) -30.72,31.16 -29.69,31.16 -29.51,31.34 -29.51,31.85 -29.71,32.05 -30.7,32.05 -32.42,30.33 -33.53,30.33 -33.78,30.08 -33.78,29.68 ; -30.36,32.82 -30.255,32.715 -30.06,32.52 -29.83,32.52 -29.69,32.52 -29.17,33.04 -29.07,33.14 -28.94,33.14 -28.8,33.14 v2(-28.49,33.45) -28.45,33.49 -28.45,34.1 -28.21,34.34 -28.07,34.48 -27.87,34.48 -27.73,34.48 -27.72,34.47 -27.65,34.4 -27.09,34.4 -26.94,34.4 -26.8,34.54 -26.72,34.62 -26.72,34.92 -26.72,35.09 -26.78,35.15 -26.94,35.31 -27.56,35.31 -27.94,35.31 -29.28,33.97 -29.49,33.76 -29.58,33.76 -29.77,33.76 -30.11,33.42 -30.36,33.17 -30.36,33.06 -30.36,32.82 ; -30.355,35.025 -30.355,35.785 -30.34,35.8 -30.1,36.04 -30.1,36.2 -30.1,37.46 -29.88,37.68 -29.41,38.15 -29.19,38.15 -29.175,38.135 -26.395,38.135 -26.36,38.1 -25.58,37.32 -25.3,37.32 -24.83,37.32 -24.77,37.26 v2(-24.7,37.26) -24.7,36.83 -24.5,36.63 -24.07,36.2 -24.07,36.1 -24.07,35.87 -24.17,35.77 -24.405,35.535 -24.63,35.535 -24.855,35.535 -25.24,35.92 -25.24,35.94 -25.24,36.29 -25.39,36.44 -26.71,37.76 -26.86,37.76 -29.15,37.76 -29.63,37.28 -29.7,37.21 -29.7,36.91 -29.7,36.04 -29.58,35.92 -29.45,35.79 -29.45,35.44 -29.45,35.06 -29.55,34.96 -29.66,34.85 -29.84,34.85 -30.18,34.85 -30.34,35.01 -30.355,35.025 ; -28.55,16.7 -28.55,17.22 -28.2,17.57 v2(-28.15,17.57) -28.09,17.51 v2(-25.95,17.51) -25.21,16.77 -22.46,16.77 -22.27,16.96 -22.27,18.78 -22.6,19.11 -22.6,19.95 -23.59,20.94 v2(-23.59,21.71) -23.59,22.3 -23.18,22.71 -20.69,22.71 -19.89,21.91 -19.36,21.91 -19.17,21.72 -19.17,21.09 -19.305,20.955 -19.885,20.955 -19.89,20.96 -19.97,20.96 -20.62,21.61 -20.62,22.02 -20.82,22.22 -21.5,22.22 -21.98,21.74 v2(-22.01,21.74) -22.01,21.33 -22.19,21.15 -22.19,19.49 -21.82,19.12 -21.82,16.51 -21.93,16.4 -26.04,16.4 -26.115,16.325 -26.765,16.325 -26.94,16.5 -28.35,16.5 -28.55,16.7 ; -19.93,-5.37 -19.93,-4.84 -19.76,-4.67 -18.98,-4.67 -18.76,-4.89 -8.5,-4.89 -6.84,-3.23 9.62,-3.23 9.62,-3.21 9.83,-3 10.7,-3 10.92,-3.22 10.92,-3.64 10.675,-3.885 9.875,-3.885 9.62,-3.63 8.12,-3.63 7.76,-3.99 v2(7.76,-4.13) 7.76,-4.08 7.34,-3.66 -6.62,-3.66 -8.26,-5.3 -18.74,-5.3 -18.995,-5.555 -19.745,-5.555 -19.93,-5.37 ; -5.25,-27.71 -5.25,-27.33 -4.635,-26.715 -1.315,-26.715 v2(-1,-26.4) -0.94,-26.4 -0.64,-26.7 13.8,-26.7 14.12,-27.02 14.12,-27.52 13.925,-27.715 13.475,-27.715 12.86,-27.1 -3.67,-27.1 -4.58,-28.01 -4.95,-28.01 -5.25,-27.71 ; -1.48,28.42 0,26.94 4.66,26.94 4.83,26.77 5.89,26.77 6.09,26.97 6.09,27.48 5.85,27.72 4.95,27.72 4.64,27.41 0.76,27.41 0.01,28.16 v2(0.01,28.64) -0.32,28.64 -0.81,29.13 -1.19,29.13 -1.48,28.84 -1.48,28.42 ; v2(47.73,0.23) 47.73,0.39 47.99,0.65 48,0.65 48.44,1.09 48.44,5.69 48.74,5.99 48.74,6.41 49.71,7.38 58.24,7.38 58.885,6.735 58.885,6.005 58.61,5.73 v5(58.14,5.73) 57.73,6.14 57.73,6.6 57.34,6.99 49.95,6.99 49.12,6.16 49.12,5.73 48.82,5.43 48.82,1.13 49.13,0.82 49.13,-0.06 48.91,-0.28 48.24,-0.28 v2(47.73,0.23)
  In3.Cu w0.1: v2(-53.46,-0.21) -52.92,0.33 -52.92,4.21 -51.02,6.11 -51.02,10.33 -49.19,12.16 v2(-49.19,13.35) -48.28,13.35 v2(-46.38,15.25) -45.51,16.12 -45.51,19.24 -41.98,22.77 -40.26,22.77 -39.74,22.25 -39.74,21.55 -40.74,20.55 -42.63,20.55 -44.21,18.97 -44.21,15.47 -43.9,15.16 -43.9,13.59 -44.39,13.1 -44.39,8.6 -45.31,7.68 -45.31,1.29 -46.41,0.19 -48.47,0.19 -50.07,-1.41 -50.07,-1.85 v2(-50.65,-2.43) -50.65,-3.52 -52.89,-5.76 -52.89,-9.35 v2(-52.54,-9.7) -52.9,-10.06 -52.9,-32.33 -45.62,-39.61 ; v2(-44.67,-38.64) -44.67,-38.66 -45.62,-39.61 ; v2(10.29,-36.73) 10.29,-39.54 9.34,-40.49 -12.84,-40.49 -15.14,-42.79 -39.23,-42.79 -41.35,-40.67 -44.56,-40.67 -45.62,-39.61
  In5.Cu w0.08: v2(-35.58,14.29) -35.3,14.29 -35.15,14.14 -35.15,13.34 -35.31,13.18 ; v2(-22.01,21.74) -21.36,22.39 -20.93,22.39 -20.57,22.03 -19.28,22.03 -19.25,22.06 -17.9,22.06 -16.91,21.07 -15.73,21.07 -15.53,20.87 -15.53,20.48 -15.72,20.29 -16.72,20.29 -18.11,21.68 -18.86,21.68 -19.23,21.31 -19.23,21.08 -19.38,20.93 -19.81,20.93 -20.05,21.17 -20.05,22.03 ; -35.31,13.18 -35.16,13.03 -35.16,12.22 -35.47,11.91 -35.47,8.68 -32.11,5.32 -25.23,5.32 v2(-24.77,5.78) -24.195,5.205 -10.615,5.205 -10.475,5.065 5.505,5.065 7.45,3.12 13.35,3.12 13.63,2.84 19.28,2.84 19.47,3.03 20.25,3.03 20.47,2.81 20.47,2.39 20.22,2.14 19.51,2.14 19.23,2.42 13.34,2.42 13.08,2.68 7.18,2.68 5.19,4.67 -10.77,4.67 -10.91,4.81 -32.31,4.81 -35.81,8.31 -35.81,11.81 -36.11,12.11 -36.11,12.97 -35.9,13.18 -35.31,13.18 ; -27.11,11.09 -27.11,12.05 -26.915,12.245 -26.025,12.245 -23.49,9.71 -16.84,9.71 -15.93,8.8 5.72,8.8 7.18,7.34 18.95,7.34 19.06,7.45 24.48,7.45 26.36,5.57 26.36,4.95 26.79,4.52 34.1,4.52 35.34,3.28 35.34,-1.21 35.66,-1.53 46.33,-1.53 47.67,-0.19 47.67,0.17 v2(47.73,0.23) 47.73,0.34 48.03,0.64 48.89,0.64 49.12,0.41 49.12,-0.05 48.85,-0.32 48.58,-0.32 47.19,-1.71 47.19,-2.02 ; -27.11,11.09 -27.3,11.09 -27.42,10.97 -27.42,10.48 -26.99,10.05 -26.67,10.05 -26.47,9.85 -26.1,9.85 -25.88,9.63 -24.89,9.63 -24.19,8.93 -18.31,8.93 -16.67,7.29 -14.83,7.29 -14.56,7.56 5.51,7.56 6.55,6.52 18.67,6.52 v2(20.03,5.16) 20.77,5.9 24.32,5.9 25.28,4.94 25.28,4.56 26.14,3.7 33.52,3.7 34.41,2.81 34.41,-1.72 35.13,-2.44 51.96,-2.44 53.05,-1.35 53.05,-0.21 54.85,1.59 57.91,1.59 61.1,4.78 61.65,4.78 62.01,5.14 62.01,5.61 61.62,6 61.185,6 60.78,5.595 60.78,5.49 v5(60.77,5.48) 60.77,5.14 57.67,2.04 54.52,2.04 51.66,-0.82 51.66,-1.41 51.05,-2.02 47.19,-2.02 ; -27.11,11.09 -26.7,11.09 -26.7,11.07 -26.37,10.74 -26.37,10.45 -26.19,10.27 -25.87,10.27 -25.64,10.04 -24.52,10.04 -23.79,9.31 -17.13,9.31 -16.23,8.41 5.41,8.41 6.87,6.95 19.2,6.95 19.87,6.28 24.95,6.28 25.94,5.29 25.94,4.63 26.48,4.09 33.74,4.09 34.89,2.94 34.89,-1.48 35.43,-2.02 47.19,-2.02 ; -18.23,-9.37 -18.23,-9.1 -18.02,-8.89 -17.5,-8.89 -17.33,-9.06 -9.93,-9.06 -9.65,-9.34 -8.61,-9.34 -8.35,-9.6 -8.35,-9.98 -9.49,-11.12 v2(-9.96,-11.12) -9.96,-9.8 -10.3,-9.46 -17.32,-9.46 -17.46,-9.6 -18,-9.6 -18.23,-9.37
  In6.Cu w0.08: v2(-44.86,-0.84) -43.79,-0.84 -43.775,-0.825 ; -33.705,-27.7 -33.705,-4.575 -33.71,-4.57 -33.71,-4.21 -33.53,-4.03 -33.53,-3.25 -33.78,-3 -34.16,-3 -34.44,-3.28 -34.44,-4.04 -34.13,-4.35 -34.13,-25.75 -34.66,-26.28 -34.66,-27.36 -34.32,-27.7 -33.31,-27.7 v2(-32.83,-28.18) ; -28.66,24.89 -28.35,24.89 -27.53,25.71 -27.53,27.83 -28.42,28.72 -28.66,28.72 ; -25,5.96 -24.82,5.78 v2(-24.77,5.78) -24.77,5.71 -24.45,5.39 -24.45,5.12 -23.28,3.95 -23.28,-0.55 -24.1,-1.37 -24.1,-1.62 -24.31,-1.83 -24.64,-1.83 -24.81,-1.66 -24.81,-1.3 -24.64,-1.13 -24.36,-1.13 -23.64,-0.41 -23.64,3.79 -25.54,5.69 -25.54,5.85 -26.65,6.96 -27.15,6.96 -27.4,7.21 -27.65,7.21 -27.91,7.47 -27.91,7.82 -27.71,8.02 -27.33,8.02 -27.1,7.79 -27.1,7.5 -26.96,7.36 -26.56,7.36 -25.35,6.15 -25.19,6.15 -24.975,5.935 ; v2(-17.83,3.11) -17.83,3.13 -18.32,3.62 -18.32,4.99 -18.13,5.18 -18.13,34.72 -19.11,35.7 -23.79,35.7 -23.97,35.52 -24.91,35.52 -25.18,35.79 -25.18,36.17 -24.93,36.42 -23.96,36.42 -23.73,36.19 -18.98,36.19 -18.37,35.58 -17.79,35.58 ; -17.37,21.5 -17.05,21.5 -16.5,22.05 -16.5,23.39 -15.36,24.53 -15.36,25.25 v2(-15.89,25.78) -15.38,26.29 -15.38,32.9 v2(-15.84,33.36) -15.84,33.46 -14.89,34.41 -14.89,36.61 -15.64,37.36 -18.95,37.36 -19.76,38.17 -19.76,39.32 -20.02,39.58 -20.02,40 -19.75,40.27 -19.31,40.27 -19.06,40.02 -19.06,39.58 -19.31,39.33 -19.31,38.46 -18.62,37.77 -15.4,37.77 -14.48,36.85 -14.48,34.13 -14.97,33.64 -14.97,24.3 -16.1,23.17 -16.1,21.75 -16.99,20.86 -16.99,5.9 -16.61,5.52 -16.61,-8.25 -17.45,-9.09 -17.45,-9.38 -17.74,-9.67 -18.02,-9.67 -18.275,-9.415 -18.275,-9.15 -17.975,-8.85 -17.725,-8.85 -16.99,-8.115 -16.99,-4.26 ; -15.71,9.51 -15.75,9.51 ; 7.03,24.18 7.03,23.31 7.04,23.3 ; v2(37.22,-21.18) 37.23,-21.18 37.66,-21.61 37.66,-22.49 ; -43.775,-0.825 -43.775,-2.775 -43.225,-3.325 -42.735,-3.325 -42.505,-3.095 -42.505,-2.375 -42.97,-1.91 -43.15,-1.91 -43.4,-1.66 -43.4,5.91 -42.86,6.45 -42.86,8 -42.59,8.27 -42.59,9.56 v2(-43.15,10.12) -43.45,10.12 -43.56,10.01 -43.56,8.57 -43.22,8.23 -43.22,6.86 -43.77,6.31 -43.77,-0.82 -43.775,-0.825 ; -29.575,32.04 -29.575,30.365 -29.58,30.36 -29.58,29.89 -28.66,28.97 -28.66,28.72 ; -29.575,32.04 -30.28,32.04 -30.47,31.85 -30.47,30.93 -29.98,30.44 -29.98,29.59 -29.06,28.67 -29.06,24.83 -31.21,22.68 -31.21,17.85 -30.67,17.31 -30.67,14.02 -29.43,12.78 -29.43,11.86 v2(-29.37,11.8) -28.89,11.32 -28.35,11.32 -27.2,10.17 -26.64,10.17 -26.48,10.33 -26.48,10.81 -26.75,11.08 ; -29.575,32.04 -29.575,33.575 -27.9,35.25 -26.94,35.25 -26.79,35.1 -26.79,34.68 -27.45,34.02 -27.92,34.02 v2(-28.49,33.45) -28.59,33.45 -29.19,32.85 -29.19,30.17 -29.01,29.99 -29.01,29.97 -27.13,28.09 -27.13,25.33 -30.42,22.04 -30.42,18.55 -29.35,17.48 -29.35,14.41 -27.14,12.2 -26.45,12.2 -26.28,12.03 -26.28,11.55 -26.75,11.08 ; -28.66,28.72 -28.66,24.59 -30.82,22.43 -30.82,18.27 -29.93,17.38 v2(-29.93,16.76) -29.99,16.7 -29.99,14.03 -27.38,11.42 -27.09,11.42 -26.75,11.08 ; -17.79,35.58 -17.79,5.39 -17.42,5.02 -17.42,-3.07 -17.6,-3.25 -18.13,-3.25 -18.37,-3.49 -18.37,-3.94 -18.06,-4.25 -17,-4.25 -16.99,-4.26 ; -17.79,35.58 -17.7,35.58 -17.59,35.69 -17.59,36.3 -17.4,36.49 -16.93,36.49 -16.73,36.29 -16.72,36.29 -16.72,35.63 -17.37,34.98 -17.37,21.63 -17.37,5.65 -16.99,5.27 -16.99,-4.26 ; -15.75,9.51 -15.741,9.51 -15.43,9.199 -15.43,9 -15.21,8.78 -15.21,-10.75 -15.25,-10.79 -15.25,-13.29 -14.925,-13.615 -14.925,-14.75 -15.125,-14.95 -15.125,-15.375 -14.91,-15.59 -14.61,-15.59 -14.42,-15.4 -14.42,-14.905 -14.575,-14.75 -14.575,-13.305 -14.91,-12.97 -14.91,-11.08 -14.8,-10.97 -14.8,8.79 -14.55,9.04 -14.55,9.86 -14.76,10.07 -15.405,10.07 -15.855,9.62 v2(-15.86,9.62) -15.75,9.51 ; -8.33,22.23 -8.33,22.82 -8.33,23.11 -8.32,23.12 ; -8.33,22.23 -9.36,22.23 -9.62,22.49 -10.05,22.49 -10.5,22.04 -10.5,20.21 -10.405,20.115 -10.405,12.575 -10.44,12.54 -10.44,7.16 v2(-10,6.72) -10.13,6.72 -10.44,6.41 -10.44,-10.61 -10.44,-10.64 v2(-9.96,-11.12) -10.04,-11.12 -10.44,-11.52 -10.44,-17.74 -10.93,-18.23 -11.84,-18.23 -12.07,-18.46 -12.99,-18.46 -13.16,-18.29 -13.16,-17.77 -12.97,-17.58 -12.06,-17.58 -11.84,-17.8 -11.19,-17.8 -10.87,-17.48 -10.87,12.8 -10.78,12.89 -10.78,19.6 -10.9,19.72 -10.9,22.29 -10.3,22.89 -9.55,22.89 -9.32,23.12 -8.32,23.12 ; -8.33,22.23 -7.52,22.23 -7.29,22.46 -7.29,23.25 -7.56,23.52 -7.56,24.93 -7.04,25.45 -6.56,25.93 -6.18,25.93 -5.86,26.25 -5.86,26.7 -6.06,26.9 -6.6,26.9 -7.93,25.57 -7.93,23.33 -8.14,23.12 -8.32,23.12 ; 7.04,23.3 7.02,23.28 6.35,23.28 6.08,23.55 6.08,24.08 6.32,24.32 6.32,25.45 6.76,25.89 7.49,25.89 7.79,26.19 7.79,26.67 7.28,27.18 v2(7.28,27.92) 8.24,27.92 8.43,27.73 8.43,26.85 8.2,26.62 8.2,25.95 7.75,25.5 7.01,25.5 6.72,25.21 6.72,24.34 6.88,24.18 7.89,24.18 8.25,23.82 8.25,21.64 7.41,20.8 7.41,8.85 6.38,7.82 6.38,-4.48 9.27,-7.37 9.27,-10.56 9.75,-11.04 9.75,-11.52 9.51,-11.76 9.09,-11.76 8.85,-11.52 8.85,-7.6 6,-4.75 6,8.01 6.96,8.97 6.96,20.97 7.81,21.82 7.81,22.82 7.35,23.28 7.04,23.28 7.04,23.3 ; 13.99,16.79 13.36,16.79 13.11,16.54 13.11,16.02 13.36,15.77 13.36,8.98 10.92,6.54 10.92,3.92 11.16,3.68 11.16,3.1 10.26,2.2 10.26,0.84 9.65,0.23 v2(9.65,-0.29) 9.65,-0.81 10.28,-1.44 10.28,-2.63 10.03,-2.88 10.03,-3.7 10.23,-3.9 10.7,-3.9 10.92,-3.68 10.92,-2.91 10.69,-2.68 10.69,-1.24 10.27,-0.82 10.27,0.28 10.65,0.66 10.65,1.98 11.55,2.88 v2(11.55,4.48) 11.55,6.51 13.76,8.72 13.76,15.25 13.85,15.34 14,15.34 ; 13.99,16.79 13.99,15.35 14,15.34 ; 13.99,16.79 13.99,19.47 13.11,20.35 13.11,22.01 13.99,22.89 13.99,33.43 13.06,34.36 13.06,45.4 10.93,47.53 10.93,49.12 9.37,50.68 4.52,50.68 3.31,49.47 3.31,49.15 4.86,47.6 6.76,47.6 7,47.36 7,46.88 6.86,46.74 5.08,46.74 2.94,48.88 2.94,49.82 4.17,51.05 9.74,51.05 11.32,49.47 11.32,47.78 13.46,45.64 13.46,39.52 14.03,38.95 v2(14.03,38.88) 13.45,38.3 13.45,34.58 14.37,33.66 14.37,22.59 13.47,21.69 13.47,20.64 14.37,19.74 14.37,15.93 17.41,12.89 17.41,11.76 17.64,11.53 17.64,10.87 17.41,10.64 17,10.64 16.76,10.88 16.76,11.51 17.01,11.76 17.01,12.65 14.32,15.34 14,15.34 ; 37.66,-22.49 37.65,-22.5 36.83,-22.5 36.51,-22.18 35.93,-22.18 34.87,-21.12 34.87,-16.96 33.83,-15.92 33.83,-11.64 33.31,-11.12 32.78,-11.12 32.62,-11.28 32.62,-11.82 33.06,-12.26 33.21,-12.26 33.46,-12.51 33.46,-15.52 32.84,-16.14 32.69,-16.29 32.58,-16.4 32.58,-16.59 32.58,-16.81 32.72,-16.95 32.8,-17.03 33.94,-17.03 34.12,-17.03 34.38,-17.29 34.49,-17.4 34.49,-21.88 34.49,-22.04 35.63,-23.18 35.76,-23.31 36.04,-23.31 36.13,-23.31 36.27,-23.17 36.31,-23.13 36.61,-23.13 36.71,-23.13 36.85,-23.27 36.95,-23.37 37.48,-23.37 37.5,-23.37 37.53,-23.34 37.66,-23.21 37.66,-22.49 ; -39.5,-3.29 -39.5,7.72 -38.8,8.42 -38.8,11.04 -39.01,11.25 -39.01,12.08 -38.82,12.27 -38.32,12.27 -38.12,12.07 -38.12,11.25 -38.38,10.99 -38.38,8.16 -39.13,7.41 -39.13,-3.02 -38.17,-3.98 -38.17,-9.55 -38.27,-9.65 v2(-38.27,-10.84) -38.44,-10.84 -38.5,-10.78 -39.01,-10.78 -39.3,-10.49 -39.3,-9.07 -38.56,-8.33 -38.56,-4.23 -39.5,-3.29 ; -15.44,13.79 -14.87,13.22 -14.49,13.22 -14.17,13.54 -14.17,13.89 v2(-14.65,14.37) -15.04,14.76 -15.04,15.16 -15.04,15.34 v2(-14.65,15.73) -15.05,16.13 -15.05,18.78 -14.4,19.43 -14.4,19.95 -14.63,20.18 -15.04,20.18 -15.44,19.78 -15.44,13.79 ; -9.29,-9.98 -9.29,-8.9 -9.04,-8.65 -9.04,-4.49 -8.41,-3.86 -8.41,9.5 -8.77,9.86 -8.77,10.48 v2(-8.74,10.51) -8.72,10.53 -8.72,10.6 -8.18,11.14 -7.5,11.14 -7.16,10.8 -7.16,10.17 -8.05,9.28 -8.05,-4.3 -8.56,-4.81 -8.56,-8.65 -8.36,-8.85 -8.36,-9.96 -8.59,-10.19 -9.08,-10.19 -9.29,-9.98 ; -5.725,-27.325 -5.725,-8.825 -5.375,-8.475 -5.375,-5.2 -5.6,-4.975 -5.6,-4.025 -5.425,-3.85 -4.925,-3.85 -4.725,-4.05 -4.725,-4.95 -4.86,-5.085 -4.86,-8.635 -5.3,-9.075 -5.3,-10.55 -4.85,-11 v2(-4.85,-11.06) -4.91,-11.06 -5.3,-11.45 -5.3,-26.325 -4.325,-27.3 -4.325,-27.775 -4.6,-28.05 -5,-28.05 -5.725,-27.325 ; v2(-2.38,19.38) -1.925,18.925 -0.85,18.925 -0.625,19.15 -0.625,20 -0.84,20.215 -0.84,21.815 -0.9,21.875 -0.9,22.4 -0.835,22.465 -0.835,28.09 -0.625,28.3 -0.625,28.875 -0.875,29.125 -1.25,29.125 -1.55,28.825 -1.55,28.39 -1.225,28.065 -1.225,22.7 -1.325,22.6 -1.325,21.65 -1.25,21.575 -1.25,20.625 -2.38,19.495 v2(-2.38,19.38) ; 5.79,49.06 5.79,49.8 6.36,50.37 9.29,50.37 9.88,49.78 9.88,26.91 9.53,26.56 9.53,4.7 10.2,4.03 10.2,3.57 9.93,3.3 9.62,3.3 9.34,3.58 9.34,4.09 9.15,4.28 9.15,26.79 9.52,27.16 9.52,37.17 v2(8.67,38.02) 9.51,38.86 9.51,49.48 9.03,49.96 7.34,49.96 6.81,49.43 6.81,49.04 6.6,48.83 6.02,48.83 5.79,49.06 ; 7.19,1.06 v2(7.19,1.43) 7.57,1.81 7.57,3.13 7.2,3.5 7.2,4.34 7.47,4.61 7.88,4.61 8.11,4.38 8.11,3.76 7.98,3.63 7.98,1.22 7.74,0.98 7.74,-1.27 8.16,-1.69 8.16,-2.08 8.29,-2.21 8.29,-3.6 v2(7.76,-4.13) 7.74,-4.13 7.35,-3.74 7.35,0.9 7.2,1.05 7.19,1.06 ; v2(30.48,-21.74) 31.58,-22.84 31.58,-26 31.98,-26.4 31.98,-29.65 31.24,-30.39 31.24,-30.91 31.49,-31.16 31.97,-31.16 32.39,-30.74 32.39,-26.05 32,-25.66 32,-22.54 32.24,-22.3 32.24,-21.44 32.03,-21.23 30.94,-21.23 30.48,-21.69 v2(30.48,-21.74) ; 44.63,0.86 44.63,1.49 44.98,1.84 v2(45.73,1.84) 46.29,1.28 49.75,1.28 50.5,2.03 50.5,5.4 50.275,5.625 50.275,6.465 50.46,6.65 50.96,6.65 51.14,6.47 51.14,5.62 50.9,5.38 50.9,1.76 50.01,0.87 48.36,0.87 47.73,0.24 v2(47.73,0.23) 47.35,0.61 47.07,0.89 45.97,0.89 45.7,0.62 44.87,0.62 44.63,0.86